# EAGLE board proiect_TSC_2 v66 (EAGLE 9.7.0)
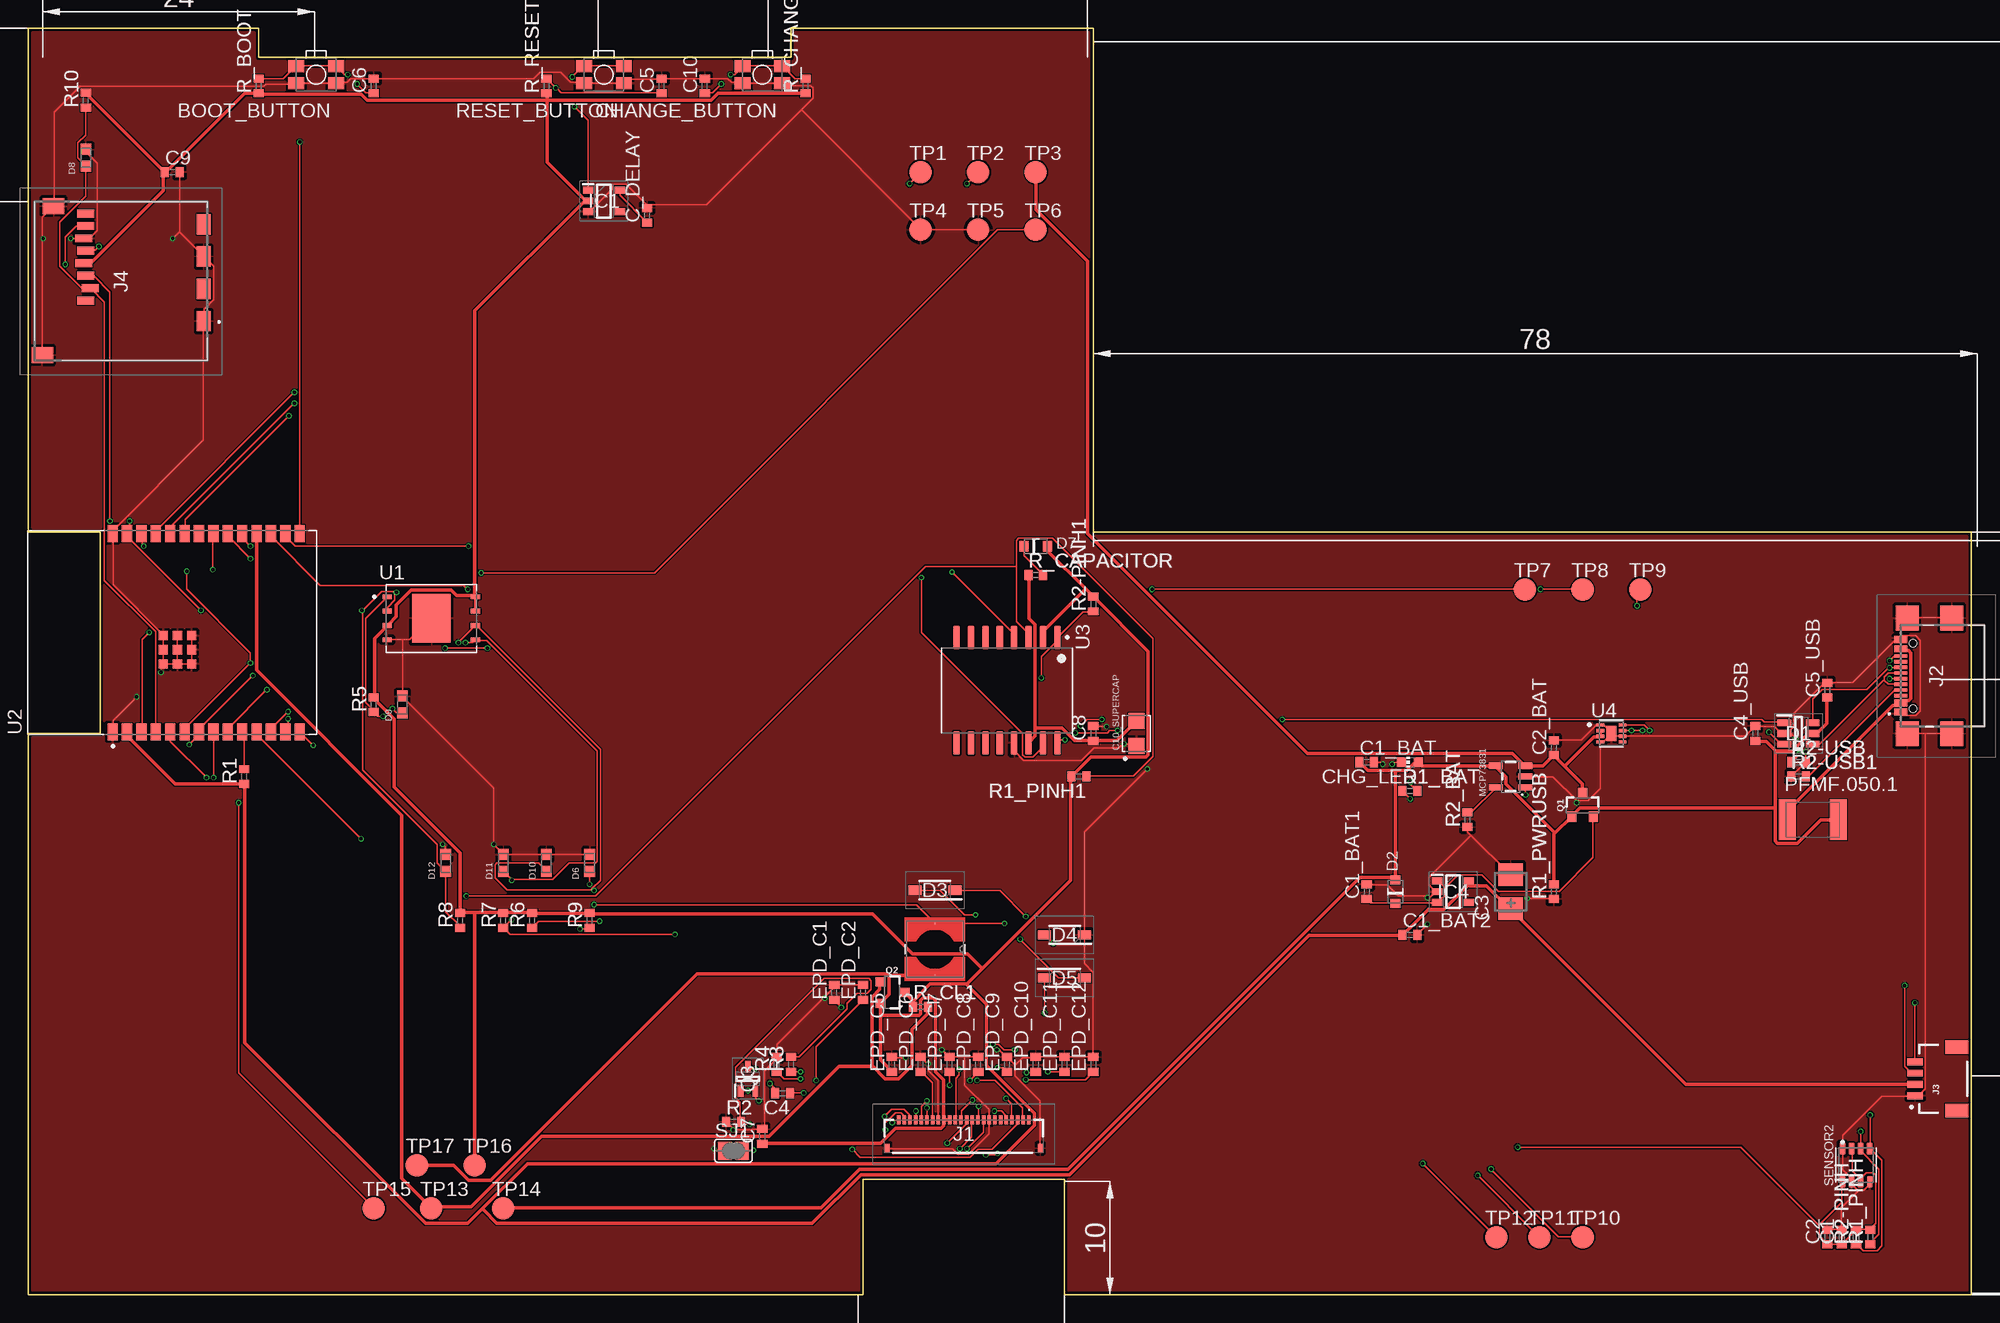
[diagram p0: board, top side]
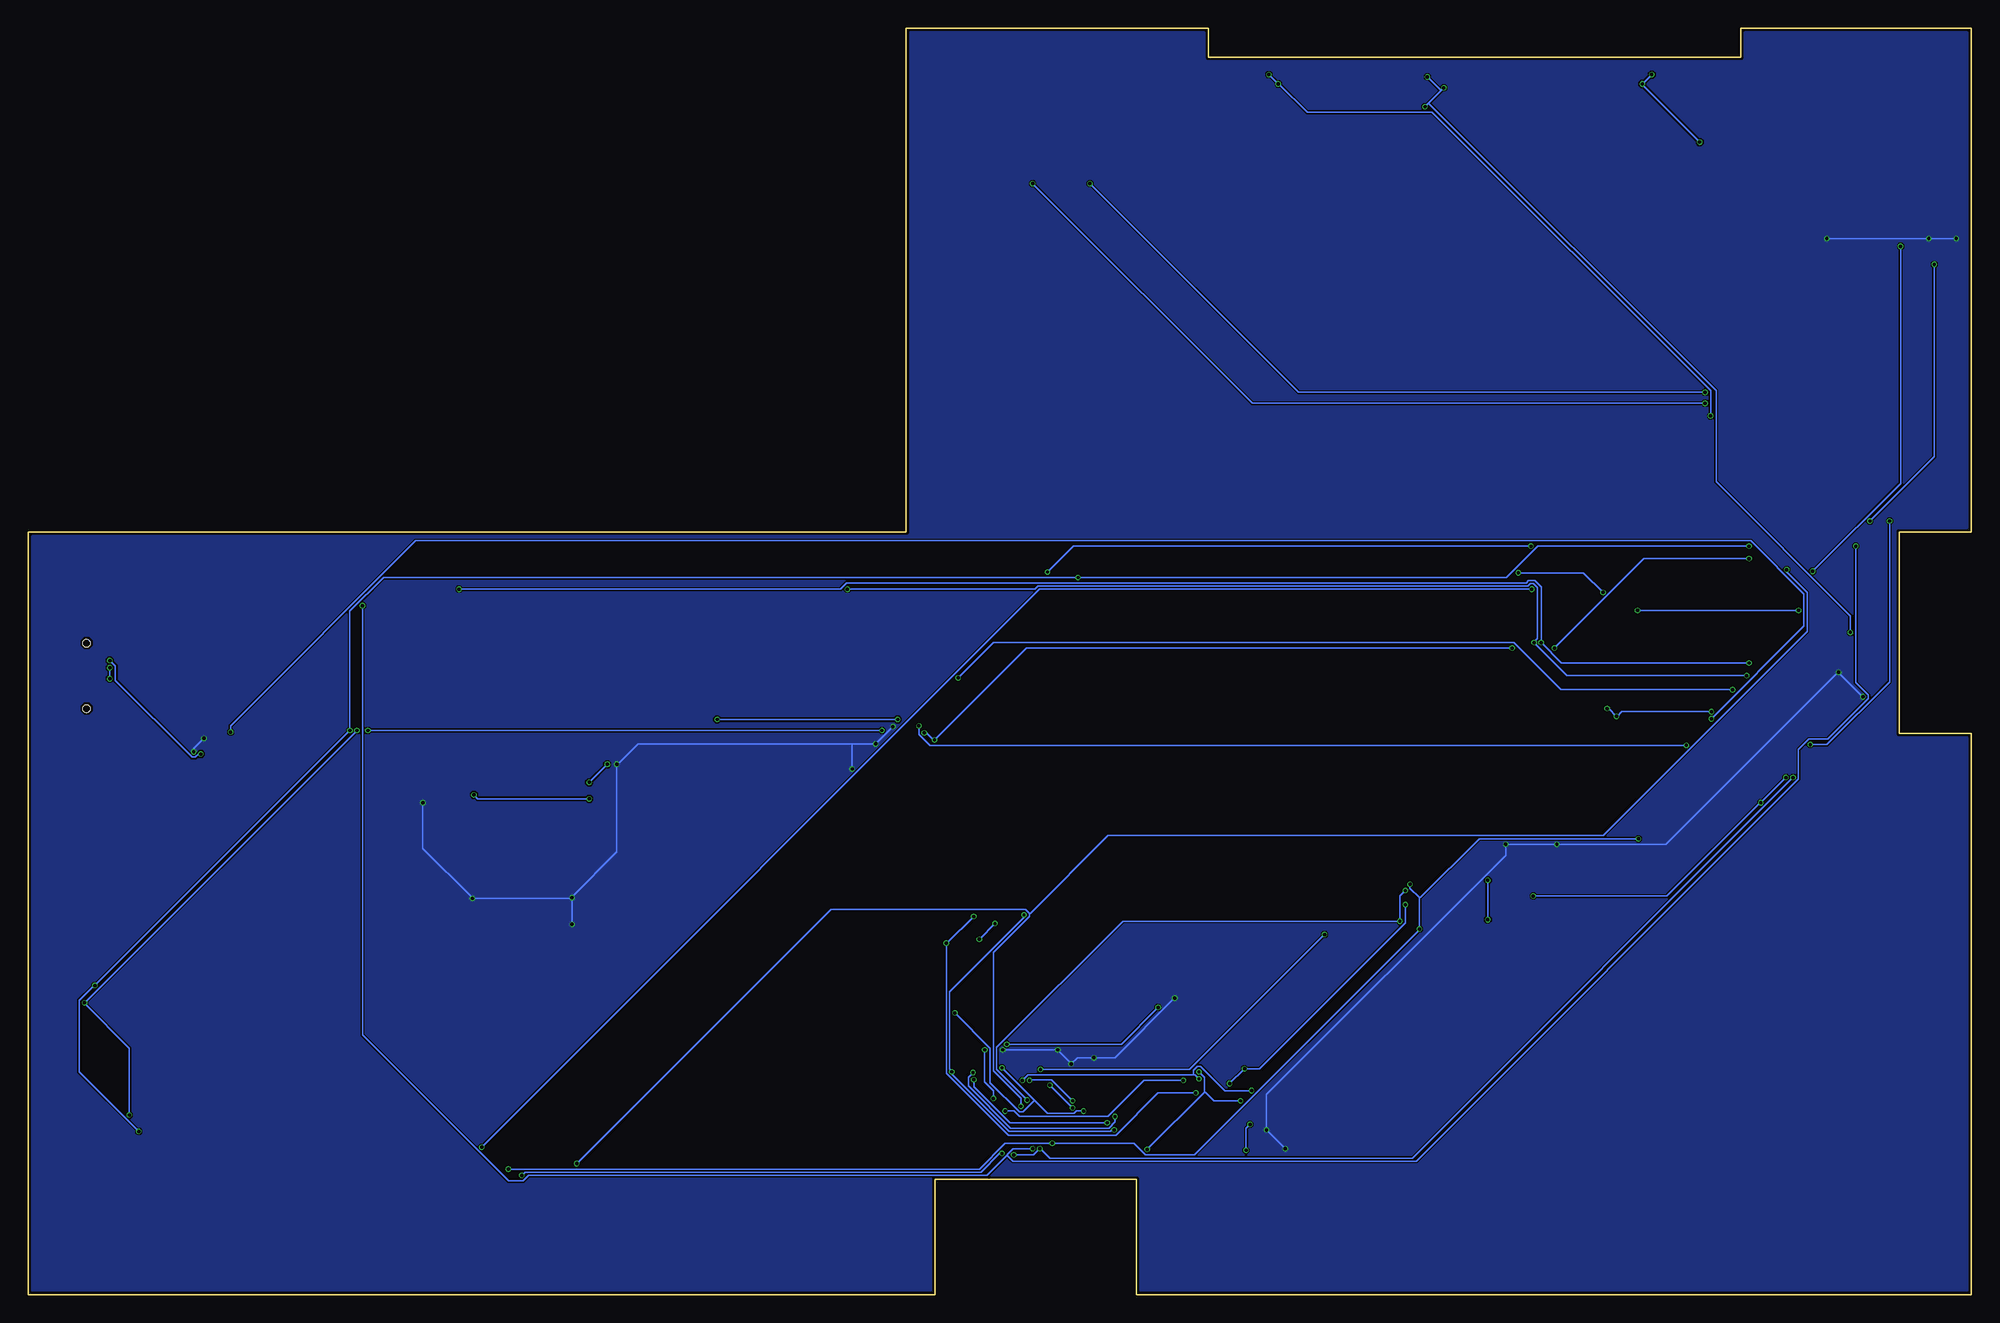
[diagram p1: board, bottom side, seen from below]

Size 171.45 x 111.76 mm. Coordinates in mm from the lower left corner, seen from the top.
Outline: 0,49.53 0,0 73.66,0 73.66,10.16 91.44,10.16 91.44,0 171.45,0 171.45,67.31 93.98,67.31 93.98,111.76 67.31,111.76 67.31,109.22 20.32,109.22 20.32,111.76 0,111.76 0,67.31 6.35,67.31 6.35,49.53 0,49.53
Copper layers (1*16): Top / Bottom
Stack-up Default Layer Stack: Top User Defined 0.035mm / Dielectric-1 User Defined 1.6mm / Bottom User Defined 0.035mm
Design rules: minimum copper width classes=1 0.3mm, minimum copper width classes=2 0.15mm, minimum copper width 0.15mm, minimum drill size 0.3mm, copper clearance wire_polygon to wire_polygon 5mil, copper clearance wire_polygon to pad_smd 5mil, copper clearance wire_polygon to via 5mil, copper clearance pad_smd to pad_smd 5mil, copper clearance pad_smd to via 5mil, copper clearance via to via 5mil, copper clearance smd to pad (same net) 5mil, copper clearance smd to via (same net) 5mil, copper clearance smd to smd (same net) 5mil, dimension clearance 0.2mm, via restrict clearance 0mil, restrict clearance 0mil, drill distance 6mil, keepout clearance 0mil
Net classes: 1 class: width 0.3 mm; 2 normal: width 0.15 mm

## Footprints (pad centres in the part's own frame; a part is rotated, then mirrored left to right if it is on the bottom)
MYBUTTON = smd 1.4 x 1.05: 1 1.75,0.75; 2 -1.75,0.75; 3 -1.75,-0.75; 4 1.75,-0.75
EAGLE-LTSPICE_C0402 = smd 0.7 x 0.9: 1 -0.65,0; 2 0.65,0
RCL_CT3528 = smd 2 x 2.2: + -1.5,0; - 1.5,0
CAPCP3225X100N = smd 1.4 x 1.4: 1 -1.1,0; 2 1.1,0
ADAFRUIT_CHIP-LED0603 = smd 0.8 x 0.8: A 0,-0.75; C 0,0.75
SOT95P280X145-6N = smd 1.2 x 0.6: 1 -1.25,0.95; 2 -1.25,0; 3 -1.25,-0.95; 4 1.25,-0.95; 5 1.25,0; 6 1.25,0.95
ESP32_WROVER_AVX---SD0805S020S1R0_AVX_SD0805S020S1R0_0 = smd 0.8 x 0.9: 1 -1.05,0; 2 1.05,0
SOD3716X135N = smd 1.15 x 0.8: 1 -1.75,0; 2 1.75,0
DIOC1608X36N = smd 0.97 x 0.94: 1 -0.75,0; 2 0.75,0
SOT95P280X125-5N = smd 0.9 x 0.6: 1 -1.4,0.95; 2 -1.4,0; 3 -1.4,-0.95; 4 1.4,-0.95; 5 1.4,0.95
SOT95P280X120-5N = smd 0.9 x 0.6: 1 -1.4,0.95; 2 -1.4,0; 3 -1.4,-0.95; 4 1.4,-0.95; 5 1.4,0.95
FH34SRJ24S05SH99 = smd 0.3 x 0.8: 1 5.75,1.45; 2 5.25,1.45; 3 4.75,1.45; 4 4.25,1.45; 5 3.75,1.45; 6 3.25,1.45; 7 2.75,1.45; 8 2.25,1.45; 9 1.75,1.45; 10 1.25,1.45; 11 0.75,1.45; 12 0.25,1.45; 13 -0.25,1.45; 14 -0.75,1.45; 15 -1.25,1.45; 16 -1.75,1.45; 17 -2.25,1.45; 18 -2.75,1.45; 19 -3.25,1.45; 20 -3.75,1.45; 21 -4.25,1.45; 22 -4.75,1.45; 23 -5.25,1.45; 24 -5.75,1.45 | smd 0.4 x 0.8: MP1 6.75,-1.05; MP2 -6.75,-1.05
SAMACSYS_PARTS_USB4110GFA = smd 0.3 x 1.15: A1 -3.35,3.678; A4 -2.55,3.678; A5 -1.25,3.678; A6 -0.25,3.678; A7 0.25,3.678; A8 1.25,3.678; A9 2.55,3.678; A12 3.35,3.678; B1 3.05,3.678; B4 2.25,3.678; B5 1.75,3.678; B6 0.75,3.678; B7 -0.75,3.678; B8 -1.75,3.678; B9 -2.25,3.678; B12 -3.05,3.678 | smd 2.18 x 2: MP1 -5.11,-0.827; MP2 5.11,-0.827; MP3 -5.11,3.103; MP4 5.11,3.103 | hole 0.65: -2.89,2.603; 2.89,2.603
JST04_1MM_RA = smd 0.6 x 1.35: 1 -1.5,0; 2 -0.5,0; 3 0.5,0; 4 1.5,0 | smd 1.2 x 2: NC1 2.8,-3.675; NC2 -2.8,-3.675
112ATAARR03ATTEND = smd 1.8 x 1.2: G1 10.6,10.4; G2 4.9,10.4; S1 7.75,10.4; S2 2.05,10.4 | smd 1.4 x 1.9: G3 13.6,-3.85; G4 0.45,-2.85 | smd 0.7 x 1.5: P1 8.8,0; P2 7.7,0.4; P3 6.6,0; P4 5.5,-0.2; P5 4.4,0; P6 3.3,-0.2; P7 2.2,0; P8 1.1,0
IND_4828-WE-TPC_WRE = smd 0.127 x 0.127: 1 -2.286,0; 2 2.286,0
ESP32_WROVER_SPARKFUN-IC-POWER_SOT23-5 = smd 0.55 x 1.2: 1 -0.95,-1.3; 2 0,-1.3; 3 0.95,-1.3; 4 0.95,1.3; 5 -0.95,1.3
ESP32C6_VARISTOR_CT/CN1812 = smd 1.5 x 3.6: 1 -2.25,0; 2 2.25,0
ESP32_WROVER_SPARKFUN-DISCRETESEMI_SOT23-3 = smd 0.8 x 0.9: 1 -0.95,-1; 2 0.95,-1; 3 0,1.1
SOT65P210X110-3N = smd 1.05 x 0.5: 1 -1.05,0.65; 2 -1.05,-0.65; 3 1.05,0
ESP32_WROVER_EAGLE-LTSPICE_R0402 = smd 0.7 x 0.9: 1 -0.65,0; 2 0.65,0
ESP32_WROVER_BME680_PSON80P300X300X100-8N = smd 1.016 x 0.5: 1 1.458,1.2; 2 1.458,0.4; 3 1.458,-0.4; 4 1.458,-1.2; 5 -1.458,-1.22; 6 -1.458,-0.4; 7 -1.458,0.4; 8 -1.458,1.2
SJ = smd 1.168 x 1.6: 1 -0.762,0; 2 0.762,0
TP20R = smd 2 x 2: TP 0,0
SON127P600X800X80-9N = smd 0.94 x 0.44: 1 -3.895,1.905; 2 -3.895,0.635; 3 -3.895,-0.635; 4 -3.895,-1.905; 5 3.895,-1.905; 6 3.895,-0.635; 7 3.895,0.635; 8 3.895,1.905 | smd 3.4 x 4.3: 9 0,0
XCVR_ESP32-C6-WROOM-1-N8 = smd 1.5 x 0.9: 1 -8.75,5.26; 2 -8.75,3.99; 3 -8.75,2.72; 4 -8.75,1.45; 5 -8.75,0.18; 6 -8.75,-1.09; 7 -8.75,-2.36; 8 -8.75,-3.63; 9 -8.75,-4.9; 10 -8.75,-6.17; 11 -8.75,-7.44; 12 -8.75,-8.71; 13 -8.75,-9.98; 14 -8.75,-11.25; 15 8.75,-11.25; 16 8.75,-9.98; 17 8.75,-8.71; 18 8.75,-7.44; 19 8.75,-6.17; 20 8.75,-4.9; 21 8.75,-3.63; 22 8.75,-2.36; 23 8.75,-1.09; 24 8.75,0.18; 25 8.75,1.45; 26 8.75,2.72; 27 8.75,3.99; 28 8.75,5.26 | smd 0.8 x 0.8: 29_1 -2.755,0.79; 29_2 -1.505,0.79; 29_3 -0.255,0.79; 29_4 -2.755,-0.46; 29_5 -1.505,-0.46; 29_6 -0.255,-0.46; 29_7 -2.755,-1.71; 29_8 -1.505,-1.71; 29_9 -0.255,-1.71
SOIC127P1032X265-16N = smd 2.05 x 0.59: 1 -4.655,4.445; 2 -4.655,3.175; 3 -4.655,1.905; 4 -4.655,0.635; 5 -4.655,-0.635; 6 -4.655,-1.905; 7 -4.655,-3.175; 8 -4.655,-4.445; 9 4.655,-4.445; 10 4.655,-3.175; 11 4.655,-1.905; 12 4.655,-0.635; 13 4.655,0.635; 14 4.655,1.905; 15 4.655,3.175; 16 4.655,4.445
SON50P200X200X80-9N = smd 0.76 x 0.27: 1 -0.985,0.75; 2 -0.985,0.25; 3 -0.985,-0.25; 4 -0.985,-0.75; 5 0.985,-0.75; 6 0.985,-0.25; 7 0.985,0.25; 8 0.985,0.75 | smd 0.9 x 1.3: 9 0,0

## Placement (x,y rotation side)
BOOT_BUTTON  BUTTON_CUSYOMV1  [MYBUTTON]  25.4,107.67 180 top
C1  100nF  [EAGLE-LTSPICE_C0402]  160.02,5.08 90 top
C1_BAT  4.7uF  [EAGLE-LTSPICE_C0402]  118.11,46.99 0 top
C1_BAT1  4.7uF  [EAGLE-LTSPICE_C0402]  118.11,35.56 90 top
C1_BAT2  4.7uF  [EAGLE-LTSPICE_C0402]  121.92,31.75 0 top
C2  100nF  [EAGLE-LTSPICE_C0402]  158.75,5.08 90 top
C2_BAT  4.7uF  [EAGLE-LTSPICE_C0402]  134.62,48.26 90 top
C3  100uF  [RCL_CT3528]  130.81,35.56 90 top
C4  4.7uF/25V  [EAGLE-LTSPICE_C0402]  66.55,17.78 180 top
C4_USB  100nF  [EAGLE-LTSPICE_C0402]  152.4,49.53 90 top
C5  1uF  [EAGLE-LTSPICE_C0402]  55.88,106.68 90 top
C5_USB  4.7uF  [EAGLE-LTSPICE_C0402]  158.75,53.34 90 top
C6  100nF  [EAGLE-LTSPICE_C0402]  30.48,106.68 90 top
C7  10uF  [EAGLE-LTSPICE_C0402]  64.77,13.97 90 top
C8  100nF  [EAGLE-LTSPICE_C0402]  93.98,49.53 90 top
C9  100nF  [EAGLE-LTSPICE_C0402]  12.7,99.06 0 top
C10  100nF  [EAGLE-LTSPICE_C0402]  59.69,106.68 90 top
C10_SUPERCAP  CPH3225A  [CAPCP3225X100N]  97.79,49.53 90 top
C_DELAY  100nF  [EAGLE-LTSPICE_C0402]  54.61,95.25 90 top
CHANGE_BUTTON  BUTTON_CUSYOMV1  [MYBUTTON]  64.77,107.67 180 top
CHG_LED  [ADAFRUIT_CHIP-LED0603]  121.92,46.99 90 top
D1  USBLC6-2SC6Y  [SOT95P280X145-6N]  156.21,49.53 0 top
D2  ESP32_WROVER_AVX---SD0805S020S1R0_AVX_SD0805S020S1R0_0_0AVX_SD0805S020S1R0_0_0  [ESP32_WROVER_AVX---SD0805S020S1R0_AVX_SD0805S020S1R0_0]  120.65,35.56 90 top
D3  MBR0530  [SOD3716X135N]  80.01,35.7 180 top
D4  MBR0530  [SOD3716X135N]  91.44,31.75 180 top
D5  MBR0530  [SOD3716X135N]  91.44,27.94 0 top
D6  PGB1010603MR  [DIOC1608X36N]  49.53,38.1 90 top
D7  ESP32_WROVER_AVX---SD0805S020S1R0_AVX_SD0805S020S1R0_0_0AVX_SD0805S020S1R0_0_0  [ESP32_WROVER_AVX---SD0805S020S1R0_AVX_SD0805S020S1R0_0]  88.9,66.04 0 top
D8  PGB1010603MR  [DIOC1608X36N]  5.08,100.33 90 top
D9  PGB1010603MR  [DIOC1608X36N]  33.02,52.07 90 top
D10  PGB1010603MR  [DIOC1608X36N]  45.72,38.1 90 top
D11  PGB1010603MR  [DIOC1608X36N]  41.91,38.1 90 top
D12  PGB1010603MR  [DIOC1608X36N]  36.83,38.1 90 top
EPD_C1  1uF/50V  [EAGLE-LTSPICE_C0402]  71.12,26.67 90 top
EPD_C2  1uF/50V  [EAGLE-LTSPICE_C0402]  73.66,26.67 90 top
EPD_C5  1uF/50V  [EAGLE-LTSPICE_C0402]  76.2,20.32 90 top
EPD_C6  1uF/50V  [EAGLE-LTSPICE_C0402]  78.74,20.32 90 top
EPD_C7  1uF/50V  [EAGLE-LTSPICE_C0402]  81.28,20.32 90 top
EPD_C8  1uF/50V  [EAGLE-LTSPICE_C0402]  83.82,20.32 90 top
EPD_C9  1uF/50V  [EAGLE-LTSPICE_C0402]  86.36,20.32 90 top
EPD_C10  1uF/50V  [EAGLE-LTSPICE_C0402]  88.9,20.32 90 top
EPD_C11  1uF/50V  [EAGLE-LTSPICE_C0402]  91.44,20.32 90 top
EPD_C12  1uF/50V  [EAGLE-LTSPICE_C0402]  93.98,20.32 90 top
IC1  BD5229G-TR  [SOT95P280X125-5N]  50.8,96.52 0 top
IC4  XC6220A331MR-G  [SOT95P280X120-5N]  125.73,35.56 0 top
J1  FH34SRJ-24S-0.5SH_99_  [FH34SRJ24S05SH99]  82.55,13.97 0 top
J2  SAMACSYS_PARTS_USB4110-GF-A  [SAMACSYS_PARTS_USB4110GFA]  168.91,54.61 90 top
J3  QWIIC_RIGHT_ANGLE  [JST04_1MM_RA]  166.5,19.05 90 top
J4  112A-TAAR-R03_ATTEND  [112ATAARR03ATTEND]  5.08,96.52 270 top
L1  68uH  [IND_4828-WE-TPC_WRE]  80.01,30.48 270 top
MCP73831  ESP32_WROVER_SPARKFUN-IC-POWER_MCP73831  [ESP32_WROVER_SPARKFUN-IC-POWER_SOT23-5]  130.81,45.72 90 top
PFMF.050.1  ESP32C6_VARISTORCN1812  [ESP32C6_VARISTOR_CT/CN1812]  157.48,41.91 0 top
Q1  20V/4.2A/52mΩ/1.4W  [ESP32_WROVER_SPARKFUN-DISCRETESEMI_SOT23-3]  137.16,43.18 0 top
Q2  20V/4.2A/52mΩ/1.4W  [ESP32_WROVER_SPARKFUN-DISCRETESEMI_SOT23-3]  76.2,26.67 270 top
Q3  SI1308EDL-T1-GE3  [SOT65P210X110-3N]  63.5,19.05 90 top
R1  10K  [ESP32_WROVER_EAGLE-LTSPICE_R0402]  19.05,45.72 90 top
R1_BAT  200  [ESP32_WROVER_EAGLE-LTSPICE_R0402]  121.92,44.45 0 top
R1_PINH  10K  [ESP32_WROVER_EAGLE-LTSPICE_R0402]  162.56,5.08 90 top
R1_PINH1  10K  [ESP32_WROVER_EAGLE-LTSPICE_R0402]  92.71,45.72 180 top
R1_PWRUSB  100k  [ESP32_WROVER_EAGLE-LTSPICE_R0402]  134.62,35.56 90 top
R2  2.2  [ESP32_WROVER_EAGLE-LTSPICE_R0402]  62.23,15.24 0 top
R2-PINH  10K  [ESP32_WROVER_EAGLE-LTSPICE_R0402]  161.29,5.08 90 top
R2-PINH1  10K  [ESP32_WROVER_EAGLE-LTSPICE_R0402]  93.98,60.96 90 top
R2-USB  5k1  [ESP32_WROVER_EAGLE-LTSPICE_R0402]  156.21,46.99 0 top
R2-USB1  5k1  [ESP32_WROVER_EAGLE-LTSPICE_R0402]  156.21,45.72 0 top
R2_BAT  2K  [ESP32_WROVER_EAGLE-LTSPICE_R0402]  127,41.91 90 top
R3  0.47  [ESP32_WROVER_EAGLE-LTSPICE_R0402]  67.31,20.32 90 top
R4  10k  [ESP32_WROVER_EAGLE-LTSPICE_R0402]  66.04,20.32 90 top
R5  10K  [ESP32_WROVER_EAGLE-LTSPICE_R0402]  30.48,52.07 90 top
R6  10K  [ESP32_WROVER_EAGLE-LTSPICE_R0402]  44.45,33.02 90 top
R7  10K  [ESP32_WROVER_EAGLE-LTSPICE_R0402]  41.91,33.02 90 top
R8  10K  [ESP32_WROVER_EAGLE-LTSPICE_R0402]  38.1,33.02 90 top
R9  10K  [ESP32_WROVER_EAGLE-LTSPICE_R0402]  49.53,33.02 90 top
R10  10K  [ESP32_WROVER_EAGLE-LTSPICE_R0402]  5.08,105.41 90 top
R_BOOT  10K  [ESP32_WROVER_EAGLE-LTSPICE_R0402]  20.32,106.68 90 top
R_CAPACITOR  15  [ESP32_WROVER_EAGLE-LTSPICE_R0402]  88.9,63.5 0 top
R_CHANGE  10K  [ESP32_WROVER_EAGLE-LTSPICE_R0402]  68.58,106.68 90 top
R_CL1  10K  [ESP32_WROVER_EAGLE-LTSPICE_R0402]  78.74,25.4 0 top
R_RESET  10K  [ESP32_WROVER_EAGLE-LTSPICE_R0402]  45.72,106.68 90 top
RESET_BUTTON  BUTTON_CUSYOMV1  [MYBUTTON]  50.8,107.67 180 top
SENSOR2  ESP32_WROVER_BME680_BME680  [ESP32_WROVER_BME680_PSON80P300X300X100-8N]  161.29,11.43 90 top
SJ1  [SJ]  62.23,12.7 0 top
TP1  TPTP20R  [TP20R]  78.74,99.06 0 top
TP2  TPTP20R  [TP20R]  83.82,99.06 0 top
TP3  TPTP20R  [TP20R]  88.9,99.06 0 top
TP4  TPTP20R  [TP20R]  78.74,93.98 0 top
TP5  TPTP20R  [TP20R]  83.82,93.98 0 top
TP6  TPTP20R  [TP20R]  88.9,93.98 0 top
TP7  TPTP20R  [TP20R]  132.08,62.23 0 top
TP8  TPTP20R  [TP20R]  137.16,62.23 0 top
TP9  TPTP20R  [TP20R]  142.24,62.23 0 top
TP10  TPTP20R  [TP20R]  137.16,5.08 0 top
TP11  TPTP20R  [TP20R]  133.35,5.08 0 top
TP12  TPTP20R  [TP20R]  129.54,5.08 0 top
TP13  TPTP20R  [TP20R]  35.56,7.62 0 top
TP14  TPTP20R  [TP20R]  41.91,7.62 0 top
TP15  TPTP20R  [TP20R]  30.48,7.62 0 top
TP16  TPTP20R  [TP20R]  39.37,11.43 0 top
TP17  TPTP20R  [TP20R]  34.29,11.43 0 top
U1  W25Q512JVEIQ  [SON127P600X800X80-9N]  35.56,59.69 0 top
U2  ESP32-C6-WROOM-1-N8  [XCVR_ESP32-C6-WROOM-1-N8]  12.7,58.42 90 top
U3  DS3231SN#  [SOIC127P1032X265-16N]  86.36,53.34 270 top
U4  MAX17048G+T10  [SON50P200X200X80-9N]  139.7,49.53 0 top

## Library data of the parts
BOOT_BUTTON CHANGE_BUTTON CHG_LED PFMF.050.1 RESET_BUTTON SJ1 TP1-TP17 = lib_proiect
C1 C1_BAT C1_BAT1 C1_BAT2 C2 C2_BAT C4 C4_USB C5 C5_USB C6-C10 C_DELAY EPD_C1 EPD_C2 EPD_C5-EPD_C12 = lib_proiect; SPICEMODEL: NONE; SPICEPREFIX: C
C3 = lib_proiect; SPICEPREFIX: C
C10_SUPERCAP = lib_proiect; AVAILABILITY: Not in stock; CHECK_PRICES: https://www.snapeda.com/parts/CPH3225A/Seiko+Instruments/view-part/?ref=eda; DESCRIPTION: 11 mF (EDLC) Supercapacitor 3.3 V 1210 (3225 Metric) - -; MF: Seiko Instruments; MP: CPH3225A; PACKAGE: 1210 Seiko; PRICE: None; PURCHASE-URL: https://www.snapeda.com/api/url_track_click_mouser/?unipart_id=562593&manufacturer=Seiko Instruments&part_name=CPH3225A&search_term=None; SNAPEDA_LINK: https://www.snapeda.com/parts/CPH3225A/Seiko+Instruments/view-part/?ref=snap
D1 = lib_proiect; AVAILABILITY: In Stock; CHECK_PRICES: https://www.snapeda.com/parts/USBLC6-2SC6Y/STMicroelectronics/view-part/?ref=eda; DESCRIPTION: 17V Clamp 5A (8/20µs) Ipp Tvs Diode Surface Mount SOT-23-6; MF: STMicroelectronics; MP: USBLC6-2SC6Y; PACKAGE: SOT-23-6 STMicroelectronics; PRICE: None; SNAPEDA_LINK: https://www.snapeda.com/parts/USBLC6-2SC6Y/STMicroelectronics/view-part/?ref=snap
D2 D7 = lib_proiect; CENTROID_NOT_SPECIFIED: No; DATASHEET: http://datasheets.avx.com/schottky.pdf; DIGIKEY_DESCRIPTION: DIODE SCHOTTKY 20V 1A 0805; DIGIKEY_PART_NUMBER: 478-7800-1-ND; LEAD_FREE: yes; MF: AVX; MOUSER_PART_NUMBER: 581-SD0805S020S1R0; PACKAGE: 0805 (2012 metric); PREFIX: D; ROHS: yes; TEMPERATURE_RANGE_HIGH: +125°C; TEMPERATURE_RANGE_LOW: -55°C
D3-D5 = lib_proiect; AVAILABILITY: In Stock; CHECK_PRICES: https://www.snapeda.com/parts/MBR0530/Onsemi/view-part/?ref=eda; DESCRIPTION: Diode Schottky 30 V 500mA Surface Mount SOD-123; MF: ON Semiconductor; MP: MBR0530; PACKAGE: SOD-123-2 ON Semiconductor; PRICE: None; PURCHASE-URL: https://www.snapeda.com/api/url_track_click_mouser/?unipart_id=179458&manufacturer=ON Semiconductor&part_name=MBR0530&search_term=None; SNAPEDA_LINK: https://www.snapeda.com/parts/MBR0530/Onsemi/view-part/?ref=snap
D6 D8-D12 = lib_proiect; AVAILABILITY: In Stock; CHECK_PRICES: https://www.snapeda.com/parts/PGB1010603MR/Littelfuse/view-part/?ref=eda; DESCRIPTION: 150V (Typ) Clamp - Ipp Tvs Diode Surface Mount 0603 (1608 Metric); MF: Littelfuse Inc.; MP: PGB1010603MR; PACKAGE: 0603 Littelfuse Inc.; PRICE: None; PURCHASE-URL: https://www.snapeda.com/api/url_track_click_mouser/?unipart_id=5659453&manufacturer=Littelfuse Inc.&part_name=PGB1010603MR&search_term=None; SNAPEDA_LINK: https://www.snapeda.com/parts/PGB1010603MR/Littelfuse/view-part/?ref=snap
IC1 = lib_proiect; DESCRIPTION: Voltage Detector with Adjustable Delay Time: CMOS processes are utilized to develop high precision, low current consumption CMOS reset ICs that allow arbitrary setting of the delay time. The extensive lineup includes both Nch Open Drain and CMOS output types in a wide range of detection voltages (from 2.3V to 6.0V, in 0.1V steps), enabling selection of the ideal solution based on customer requirements. In addition, the entire series is of course both lead-free and RoHS-compliant.; HEIGHT: 1.25mm; MANUFACTURER_NAME: ROHM Semiconductor; MANUFACTURER_PART_NUMBER: BD5229G-TR; MOUSER_PART_NUMBER: 755-BD5229G-TR; MOUSER_PRICE-STOCK: https://www.mouser.co.uk/ProductDetail/ROHM-Semiconductor/BD5229G-TR?qs=4kLU8WoGk0vvnhrrYwdszw%3D%3D
IC4 = lib_proiect; DESCRIPTION: LDO Voltage Regulators; HEIGHT: 1.2mm; MANUFACTURER_NAME: Torex; MANUFACTURER_PART_NUMBER: XC6220A331MR-G; MOUSER_PART_NUMBER: 865-XC6220A331MR-G; MOUSER_PRICE-STOCK: https://www.mouser.co.uk/ProductDetail/Torex-Semiconductor/XC6220A331MR-G?qs=AsjdqWjXhJ8ZSWznL1J0gg%3D%3D
J1 = lib_proiect; DESCRIPTION: 24 Position FFC, FPC Connector Contacts, Top and Bottom 0.020" (0.50mm) Surface Mount, Right Angle; HEIGHT: 1.1mm; MANUFACTURER_NAME: Hirose; MANUFACTURER_PART_NUMBER: FH34SRJ-24S-0.5SH(99); MOUSER_PART_NUMBER: 798-FH34SRJ24S05SH99; MOUSER_PRICE-STOCK: https://www.mouser.co.uk/ProductDetail/Hirose-Connector/FH34SRJ-24S-0.5SH99?qs=vcbW%252B4%252BSTIpKBl5ap9J8Fw%3D%3D
J2 = lib_proiect; DESCRIPTION: CONN USB 2.0 TYPE-C R/A SMT; HEIGHT: 3.26mm; MANUFACTURER_NAME: GCT (GLOBAL CONNECTOR TECHNOLOGY); MANUFACTURER_PART_NUMBER: USB4110-GF-A; MOUSER_PART_NUMBER: 640-USB4110-GF-A; MOUSER_PRICE-STOCK: https://www.mouser.co.uk/ProductDetail/GCT/USB4110-GF-A?qs=KUoIvG%2F9IlYiZvIXQjyJeA%3D%3D
J3 = lib_proiect; PROD_ID: CONN-13694
J4 = lib_proiect; DESCRIPTION: Micro SD Card Socket, Push-Push Type, Top Mount, SMT, H=1.83mm, 10u; HEIGHT: 1.9mm; MANUFACTURER_NAME: ATTEND; MANUFACTURER_PART_NUMBER: 112A-TAAR-R03 ATTEND
L1 = lib_proiect; COPYRIGHT: Copyright (C) 2024 Ultra Librarian. All rights reserved.; MANUFACTURER_PART_NUMBER: 744043680; MFR_NAME: Wurth Electronics
MCP73831 = lib_proiect; PROD_ID: IC-09995
Q1 Q2 = lib_proiect; PROD_ID: TRAN-14388
Q3 = lib_proiect; AVAILABILITY: In Stock; CHECK_PRICES: https://www.snapeda.com/parts/SI1308EDL-T1-GE3/Vishay+Siliconix/view-part/?ref=eda; DESCRIPTION: Si1308EDL-T1-GE3 N-channel MOSFET Transistor, 1.5 A, 30 V, 3-Pin SC-70 | Siliconix / Vishay SI1308EDL-T1-GE3; MF: Vishay Siliconix; MP: SI1308EDL-T1-GE3; PACKAGE: SOT-323 Vishay Semiconductor; PRICE: None; PURCHASE-URL: https://www.snapeda.com/api/url_track_click_mouser/?unipart_id=274603&manufacturer=Vishay Siliconix&part_name=SI1308EDL-T1-GE3&search_term=None; SNAPEDA_LINK: https://www.snapeda.com/parts/SI1308EDL-T1-GE3/Vishay+Siliconix/view-part/?ref=snap
R1 R1_BAT R1_PINH R1_PINH1 R1_PWRUSB R2 R2-PINH R2-PINH1 R2-USB R2-USB1 R2_BAT R3-R10 R_BOOT R_CAPACITOR R_CHANGE R_CL1 R_RESET = lib_proiect; SPICEMODEL: NONE; SPICEPREFIX: R
SENSOR2 = lib_proiect; AVAILABILITY: Unavailable; DESCRIPTION: Integrated Environmental Unit; MF: Bosch Sensortec; MP: BME680; PACKAGE: LGA-8 Bosch Tools; PRICE: None
U1 = lib_proiect; AVAILABILITY: In Stock; CHECK_PRICES: https://www.snapeda.com/parts/W25Q512JVEIQ/Winbond+Electronics/view-part/?ref=eda; DESCRIPTION: FLASH - NOR Memory IC 512Mb (64M x 8) SPI - Quad I/O 133 MHz 8-WSON (8x6); MF: Winbond Electronics; MP: W25Q512JVEIQ; PACKAGE: Package; PRICE: None; SNAPEDA_LINK: https://www.snapeda.com/parts/W25Q512JVEIQ/Winbond+Electronics/view-part/?ref=snap
U2 = lib_proiect; AVAILABILITY: In Stock; CHECK_PRICES: https://www.snapeda.com/parts/ESP32-C6-WROOM-1-N8/Espressif+Systems/view-part/?ref=eda; DESCRIPTION: Multiprotocol Modules ESP32-C6 module, Wi-Fi 6 in 2.4 GHz band, Bluetooth 5, Zigbee 3.0 and Thread. ESP34-WROOM Compatible - ENGINEERING SAMPLE; MF: Espressif Systems; MP: ESP32-C6-WROOM-1-N8; PACKAGE: None; PRICE: None; SNAPEDA_LINK: https://www.snapeda.com/parts/ESP32-C6-WROOM-1-N8/Espressif+Systems/view-part/?ref=snap
U3 = lib_proiect; AVAILABILITY: In Stock; CHECK_PRICES: https://www.snapeda.com/parts/DS3231SN%23/Analog+Devices/view-part/?ref=eda; DESCRIPTION: Extremely Accurate I²C-Integrated RTC/TCXO/Crystal; MF: Analog Devices; MP: DS3231SN#; PACKAGE: SOIC-16 Maxim; PRICE: None; PURCHASE-URL: https://www.snapeda.com/api/url_track_click_mouser/?unipart_id=99048&manufacturer=Analog Devices&part_name=DS3231SN#&search_term=None; SNAPEDA_LINK: https://www.snapeda.com/parts/DS3231SN%23/Analog+Devices/view-part/?ref=snap
U4 = lib_proiect; AVAILABILITY: In Stock; CHECK_PRICES: https://www.snapeda.com/parts/MAX17048G+T10/Analog+Devices/view-part/?ref=eda; DESCRIPTION: 3µA 1-Cell/2-Cell Fuel Gauge with ModelGauge; MF: Analog Devices; MP: MAX17048G+T10; PACKAGE: TDFN-8 Maxim; PRICE: None; PURCHASE-URL: https://www.snapeda.com/api/url_track_click_mouser/?unipart_id=329239&manufacturer=Analog Devices&part_name=MAX17048G+T10&search_term=None; SNAPEDA_LINK: https://www.snapeda.com/parts/MAX17048G+T10/Analog+Devices/view-part/?ref=snap

## Nets
3V3 [class]: C1_BAT2.1 C3.+ C9.1 D7.2 IC1.2 IC4.5 J3.2 J4.P4 Q2.3 R1.1 R1_PINH1.2 R2-PINH1.2 R5.2 R6.2 R7.2 R8.2 R9.2 R10.2 R_BOOT.1 R_CHANGE.1 R_CL1.1 R_RESET.1 TP16.TP U1.3 U1.7 U1.8 U2.2 U3.2
32KHZ [normal]: R2-PINH1.1 U2.9 U3.1
DN [normal]: D1.4 J2.A7 J2.B7
DP [normal]: D1.6 J2.A6 J2.B6
EPD_3V3 [class]: C7.1 EPD_C5.1 J1.15 J1.16 L1.2 Q2.2 TP17.TP
EPD_3V3_C [class]: Q2.1 R_CL1.2 TP13.TP U2.18
EPD_BUSY [normal]: J1.9 TP9.TP U2.26
EPD_CS [normal]: D6.1 J1.12 R9.1 TP10.TP U2.11
EPD_DC [normal]: J1.11 TP11.TP U2.5
EPD_RST [normal]: J1.10 TP12.TP U2.21
FLASH_CS [normal]: D9.1 R5.1 U1.1 U2.12
GDR [normal]: J1.2 Q3.1 R4.1
GND [normal]: BOOT_BUTTON.1 BOOT_BUTTON.2 C1.2 C1_BAT1.2 C1_BAT2.2 C1_BAT.2 C2.2 C2_BAT.2 C3.- C4_USB.2 C5.2 C5_USB.2 C6.2 C7.2 C8.2 C9.2 C10.2 C10_SUPERCAP.1 C_DELAY.2 CHANGE_BUTTON.1 CHANGE_BUTTON.2 D1.2 D4.1 D6.2 D8.2 D9.2 D10.2 D11.2 D12.2 EPD_C1.2 EPD_C2.2 EPD_C5.2 EPD_C6.2 EPD_C7.2 EPD_C8.2 EPD_C9.2 EPD_C10.2 EPD_C11.2 EPD_C12.2 IC1.3 IC4.2 J1.8 J1.17 J1.MP1 J1.MP2 J2.A1 J2.A12 J2.B1 J2.B12 J2.MP1 J2.MP2 J2.MP3 J2.MP4 J3.1 J4.G1 J4.G2 J4.G3 J4.G4 J4.P6 MCP73831.2 R1_PWRUSB.1 R2-USB1.1 R2-USB.2 R2.1 R2_BAT.1 R4.2 RESET_BUTTON.1 RESET_BUTTON.2 SENSOR2.1 SENSOR2.5 SENSOR2.7 SJ1.1 TP4.TP TP5.TP U1.4 U1.9 U2.1 U2.28 U2.29_1 U2.29_2 U2.29_3 U2.29_4 U2.29_5 U2.29_6 U2.29_7 U2.29_8 U2.29_9 U3.13 U4.1 U4.4 U4.6 U4.9
GPIO8 [normal]: R1.2 U2.10
I2C_PW [normal]: C1.1 C2.1 R1_PINH.2 R2-PINH.2 SENSOR2.2 SENSOR2.6 SENSOR2.8 U2.17
INT_RTC [normal]: R1_PINH1.1 TP15.TP U2.8 U3.3
IO/BOOT [normal]: BOOT_BUTTON.3 BOOT_BUTTON.4 C6.1 R_BOOT.2 U2.15
IO/CHANGE [normal]: C10.1 CHANGE_BUTTON.3 CHANGE_BUTTON.4 R_CHANGE.2 U2.23
MISO [normal]: D12.1 J4.P7 R8.1 TP6.TP U1.2 U2.27
MOSI [normal]: D11.1 J1.14 J4.P3 R7.1 TP7.TP U1.5 U2.7
N$1 [normal]: J2.A5 R2-USB1.2
N$2 [normal]: J2.B5 R2-USB.1
N$3 [normal]: C1_BAT1.1 D2.1 IC4.1 IC4.3 Q1.2
N$4 [normal]: C4.1 D3.1 D4.2
N$5 [normal]: MCP73831.1 R1_BAT.1
N$6 [normal]: CHG_LED.C R1_BAT.2
N$7 [normal]: MCP73831.5 R2_BAT.2
N$8 [normal]: EPD_C12.1 J1.24
N$9 [normal]: C_DELAY.1 IC1.5
N$10 [normal]: EPD_C10.1 J1.22
N$11 [normal]: D7.1 R_CAPACITOR.2
N$12 [normal]: EPD_C8.1 J1.20
N$13 [normal]: EPD_C7.1 J1.19
N$14 [normal]: EPD_C6.1 J1.18
N$15 [normal]: EPD_C2.1 J1.5
N$16 [normal]: EPD_C1.1 J1.4
PREVGH [normal]: D5.1 EPD_C9.1 J1.21
PREVGL [normal]: D3.2 EPD_C11.1 J1.23
RESE [normal]: J1.3 Q3.2 R3.1
RESE' [normal]: R2.2 R3.2 SJ1.2
RESET [normal]: C5.1 IC1.1 R_RESET.2 RESET_BUTTON.3 RESET_BUTTON.4 U2.3
RTC_RST [normal]: U2.16 U3.4
RX [normal]: TP2.TP U2.24
SCK [normal]: D10.1 J1.13 J4.P5 R6.1 TP8.TP U1.6 U2.6
SCL [normal]: J3.4 R2-PINH.1 SENSOR2.4 U2.20 U3.16 U4.7
SDA [normal]: J3.3 R1_PINH.1 SENSOR2.3 U2.19 U3.15 U4.8
SRC [normal]: C4.2 D5.2 L1.1 Q3.3
SS_SD [normal]: D8.1 J4.P2 R10.1 U2.4
TX [normal]: TP1.TP U2.25
USB_D+ [normal]: D1.1 U2.14
USB_D- [normal]: D1.3 U2.13
VBAT [class]: C2_BAT.1 MCP73831.3 Q1.3 TP3.TP U4.2 U4.3
VBUS [class]: C1_BAT.1 C4_USB.1 C5_USB.1 CHG_LED.A D1.5 D2.2 MCP73831.4 PFMF.050.1.2 Q1.1 R1_PWRUSB.2 TP14.TP
VRTC: C8.1 C10_SUPERCAP.2 R_CAPACITOR.1 U3.14
VUSB [class]: J2.A4 J2.A9 J2.B4 J2.B9 PFMF.050.1.1

## Tracks (layer width: path | path; a pad name or v marks a point on that pad's centre or on a via)
3V3
  Top 0.3: C9.1 11.98,99.09 5.06,106.02 R10.2 | C9.1 12.19,99.09 19.11,106.02 20.29,106.02 R_BOOT.1 20.43,105.95 29.36,105.95 29.92,105.4 45.64,105.4 45.78,105.4 | J4.P4 4.92,91.06 5.54,91.06 11.91,97.43 11.91,98.96 C9.1 | 45.78,105.4 45.78,99.92 49.17,96.53 49.38,96.53 IC1.2 49.03,96.46 39.4,86.84 39.4,61.84 39.34,61.7 | 45.78,105.4 45.78,106.02 R_RESET.1 | R_CHANGE.1 68.56,106.02 60.87,106.02 60.25,105.4 45.91,105.4 45.78,105.4 | U1.7 39.47,60.38 39.47,61.56 U1.8 39.34,61.7 | 39.34,61.7 37.81,61.7 37.33,62.18 33.8,62.18 32.48,60.87 32.48,59.83 31.79,59.14 U1.3 31.65,59 30.54,57.89 30.54,52.76 R5.2 30.61,52.63 30.61,52.49 32.27,50.83 32.27,44.8 38.09,38.98 38.09,33.86 R8.2 38.16,33.72 39.4,33.72 | 39.4,33.72 41.9,33.72 R7.2 42.04,33.72 44.39,33.72 R6.2 44.6,33.65 49.52,33.65 R9.2 49.65,33.58 74.51,33.58 78.05,30.05 82.89,30.05 84.07,28.87 84.17,28.77 | TP16.TP 39.4,11.49 39.4,33.58 39.4,33.72 | 127.08,36.15 124.93,34 123.54,34 121.33,31.78 C1_BAT2.1 121.12,31.71 113.02,31.71 91.9,10.59 73.48,10.59 69.18,6.3 41.34,6.3 40.17,7.48 40.06,7.58 | 127.08,36.15 127.08,36.49 IC4.5 | J3.2 166.48,18.55 146.26,18.55 130.81,34 C3.+ 130.68,34.07 128.67,36.08 127.21,36.08 127.08,36.15 | U2.2 8.73,49.65 8.73,49.3 12.95,45.08 R1.1 19.11,44.94 19.11,22.23 35.04,6.3 38.78,6.3 40.06,7.58 | 78.05,25.97 78.05,25.41 R_CL1.1 | 78.05,25.97 77.35,26.66 Q2.3 | 93.32,62.29 93.9,61.7 R2-PINH1.2 94.04,61.56 98.82,56.78 98.82,47.64 98.61,47.43 93.77,47.43 92.1,45.77 R1_PINH1.2 91.97,45.63 91.97,36.56 84.17,28.77 | 93.32,62.29 89.96,65.65 89.96,65.99 D7.2 | 82.82,27.42 79.57,27.42 78.18,26.03 78.05,25.97
  Top 0.3: 84.17,28.77 82.82,27.42 | U3.2 89.54,58.03 89.54,58.51 93.21,62.18 93.32,62.29 | 40.06,7.58 44.04,11.56 85.39,11.56 88.78,14.95 88.78,15.99 84.56,20.22 84.56,25.62 82.89,27.28 82.82,27.42
32KHZ  (via drill 0.3)
  Top 0.15: R2-PINH1.1 93.97,60.24 93.07,60.24 90.86,58.03 U3.1 90.79,57.96 90.79,57.68 89.4,56.3 v89.4,54.43 | v21.05,53.39 17.66,49.99 17.66,49.72 U2.9
  Bottom 0.15: v21.05,53.39 36.22,53.39 40.37,57.54 86.29,57.54 v89.4,54.43
DN
  Top 0.15: 163.78,54.22 164.12,53.87 165.23,53.87 J2.B7 | 163.78,54.22 163.78,54.5 164.12,54.84 165.23,54.84 J2.A7 | D1.4 157.48,48.61 158.1,48.61 163.71,54.22 163.78,54.22
DP  (via drill 0.3)
  Top 0.15: v164.26,54.36 J2.A6 | J2.B6 165.23,55.33 v164.26,55.33 164.19,55.33 162.25,53.39 158.31,53.39 157.48,52.56 157.48,50.55 D1.6
  Bottom 0.15: v164.26,55.33 v164.26,54.36
EPD_3V3
  Top 0.3: J1.16 80.82,15.44 81.23,15.44 J1.15 | C7.1 64.82,13.36 75.21,13.36 76.52,14.68 80.54,14.68 80.75,14.89 80.75,15.3 J1.16 | 75.21,24.65 75.21,25.69 Q2.2 75.28,25.83 75.97,26.52 75.97,28.11 | 75.21,24.65 75.21,20.7 76.18,19.73 EPD_C5.1 | 75.97,28.11 75.76,28.32 59,28.32 40.79,10.11 38.85,10.11 37.54,11.42 34.35,11.42 TP17.TP | L1.2 79.98,28.18 76.11,28.18 75.97,28.11 | J1.16 80.75,15.58 80.75,18.97 80.05,19.66 80.05,25.97 79.85,26.17 78.95,26.17 78.74,25.97 78.74,24.79 78.6,24.65 75.34,24.65 75.21,24.65
EPD_3V3_C
  Top 0.3: 74.45,20.22 74.45,26.24 75.14,26.93 75.14,27.56 Q2.1 | 74.45,20.22 75.62,19.04 76.8,19.04 77.98,20.22 77.98,23.4 79.36,24.79 79.36,25.34 R_CL1.2 | U2.18 20.15,67.17 20.15,55.12 32.96,42.31 32.96,10.25 35.53,7.68 TP13.TP 35.66,7.75 39.06,7.75 45.29,13.98 65.37,13.98 71.54,20.15 74.31,20.15 74.45,20.22
EPD_BUSY  (via drill 0.3)
  Top 0.15: v82.82,12.88 84.28,14.33 84.28,15.37 J1.9 | v141.96,60.8 141.96,61.98 142.17,62.18 TP9.TP | v10.18,66.06 10.04,66.2 10.04,67.17 U2.26
  Bottom 0.15: v82.82,12.88 84.56,12.88 85.04,12.39 85.04,12.32 | 85.04,12.32 86.84,10.52 127.28,10.52 127.77,10.04 129.08,10.04 141.96,22.92 v141.96,60.8 | v10.18,66.06 10.18,54.01 9.07,52.9 9.07,52.63 12.67,49.02 14.34,49.02 15.24,48.12 15.24,45.49 48.96,11.77 84.56,11.77 85.04,12.25 85.04,12.32
EPD_CS  (via drill 0.3)
  Top 0.15: v81.09,13.36 82.75,15.02 82.75,15.37 J1.12 | v48.68,32.27 49.45,32.27 49.52,32.34 R9.1 | v49.52,36.21 49.52,37.32 D6.1 | v29.36,40.23 20.15,49.44 20.15,49.65 U2.11 | v129.08,11.08 135.04,5.12 137.12,5.12 TP10.TP
  Bottom 0.15: v49.52,36.21 49.52,35.87 48.68,35.04 | 48.68,35.04 48.68,32.34 v48.68,32.27 48.68,32.2 68.56,12.32 72.85,12.32 73.89,13.36 v81.09,13.36 81.16,13.36 85.25,13.36 87.53,11.08 v129.08,11.08 | v29.36,40.23 43.42,40.23 48.62,35.04 48.68,35.04
EPD_DC  (via drill 0.3)
  Top 0.15: v82.2,12.88 83.24,13.92 83.24,15.37 J1.11 | v84.49,12.32 85.39,12.32 v85.53,12.46 | v127.91,10.52 133.31,5.12 TP11.TP | v15.72,45.63 12.54,48.82 12.54,49.65 U2.5
  Bottom 0.15: v84.49,12.32 82.75,12.32 v82.2,12.88 82.13,12.88 81.3,12.05 49.31,12.05 v15.72,45.63 | v85.53,12.46 85.73,12.46 87.39,10.8 127.63,10.8 v127.91,10.52
EPD_RST  (via drill 0.3)
  Top 0.15: v83.86,16.62 83.86,15.44 J1.10 | v123.06,11.56 129.5,5.12 TP12.TP | v16.27,63.98 16.27,67.17 U2.21
  Bottom 0.15: v83.86,16.62 83.86,17.31 86.29,19.73 86.29,30.19 83.1,33.38 83.1,33.65 | 83.1,33.65 83.45,34 100.62,34 v123.06,11.56 | v16.27,63.98 16.27,63.78 14.47,61.98 14.47,58.51 32.48,40.51 76.18,40.51 83.03,33.65 83.1,33.65
FLASH_CS  (via drill 0.3)
  Top 0.15: U1.1 31.65,61.56 29.78,59.69 29.78,52.28 30.47,51.59 30.47,51.45 R5.1 30.54,51.38 30.89,51.03 v31.3,51.03 | v32.13,51.73 32.48,51.38 32.96,51.38 D9.1 | v22.92,51.45 21.47,49.99 21.47,49.72 U2.12
  Bottom 0.15: v32.13,51.73 31.99,51.73 v31.3,51.03 31.23,51.03 30.82,51.45 v22.92,51.45
GDR  (via drill 0.3)
  Top 0.15: v83.73,18.9 85.32,18.9 87.74,16.48 87.74,15.44 J1.2 | v68.14,19.04 66.69,19.04 66.07,19.66 R4.1 | v63.5,18 62.88,18 Q3.1
  Bottom 0.15: v83.73,18.9 83.24,19.39 68.63,19.39 | 68.63,19.39 68.49,19.39 v68.14,19.04 | v63.5,18 65.86,18 68,20.15 68.28,20.15 68.63,19.8 68.63,19.46 68.63,19.39
GND  (via drill 0.3)
  Top 0.15: TP5.TP 83.79,93.97 78.81,93.97 TP4.TP 78.74,94.04 68.21,104.56 | IC1.3 49.45,95.63 49.58,95.63 51.52,97.57 51.52,97.85 51.66,97.99 52.77,97.99 54.57,96.19 54.57,95.91 C_DELAY.2 54.64,96.19 59.83,96.19 68.21,104.56 | 68.21,104.56 69.25,105.6 69.25,106.5 69.04,106.71 66.69,106.71 66.55,106.85 CHANGE_BUTTON.2 66.48,106.92 63.09,106.92 CHANGE_BUTTON.1 63.02,106.99 62.05,106.99 61.7,107.33 C10.2 59.63,107.33 C5.2 55.82,107.26 52.84,107.26 52.56,106.99 RESET_BUTTON.2 52.49,106.92 49.1,106.92 RESET_BUTTON.1 49.03,106.99 47.85,106.99 46.95,107.89 45.15,107.89 44.6,107.33 30.54,107.33 C6.2 28.46,107.33 28.12,106.99 27.22,106.99 BOOT_BUTTON.2 27.08,106.92 23.68,106.92 BOOT_BUTTON.1 23.61,106.85 20.98,106.85 20.78,106.64 4.57,106.64 2.29,104.36 2.29,96.12 J4.G4 2.22,96.05 1.25,95.08 1.25,93.21 | v36.57,39.75 36.77,39.54 36.77,38.91 D12.2 | D6.2 49.52,38.85 45.78,38.85 D10.2 45.71,38.85 41.97,38.85 D11.2 41.9,38.91 v41.07,39.75 41.07,39.81 41.07,44.73 33.03,52.76 D9.2 33.03,52.83 33.03,57.75 33.03,57.82 | 33.03,57.82 33.66,57.82 35.53,59.69 U1.9 | 33.03,57.82 31.72,57.82 U1.4 | D8.2 5.13,101.03 5.13,100.82 6.1,99.85 6.1,93.9 5.47,93.28 4.92,93.28 J4.P6 4.85,93.21 v3.74,93.21 | 1.25,93.21 1.25,82.96 J4.G3 | v1.32,93.21 1.25,93.21 | 13.37,93.76 13.37,99.02 C9.2 | 13.37,93.76 15.44,91.68 J4.G2 15.51,91.61 16.34,90.78 16.34,87.81 15.51,86.97 15.51,85.94 J4.G1 15.44,85.87 15.44,75.41 7.48,67.45 7.48,67.24 U2.28 7.48,67.17 7.48,62.67 11.91,58.24 U2.29_3 11.91,58.1 11.91,56.99 U2.29_2 11.91,56.85 11.91,55.67 U2.29_1 | U2.29_4 13.16,55.67 11.98,55.67 U2.29_1
  Top 0.15: U2.29_4 13.16,55.74 13.16,56.85 U2.29_5 13.16,56.99 13.16,58.1 U2.29_6 | U2.29_4 13.23,55.67 14.41,55.67 U2.29_7 14.41,55.74 14.41,56.85 U2.29_8 14.41,56.99 14.41,58.1 U2.29_9 | v9.56,52.76 7.48,50.69 7.48,49.72 U2.1 | v11.7,54.91 11.7,55.46 11.84,55.6 U2.29_1 | v12.74,93.21 13.3,93.76 13.37,93.76 | C2.2 158.79,5.74 159.97,5.74 C1.2 159.97,5.81 159.97,7.68 161.42,9.14 161.42,9.21 | 161.42,9.21 160.94,9.69 160.94,9.97 SENSOR2.7 160.87,10.04 160.87,10.25 160.11,11.01 160.11,12.88 SENSOR2.1 160.11,12.95 160.11,14.05 163.57,17.52 166.48,17.52 J3.1 166.55,17.59 166.82,17.59 167.38,18.14 167.38,49.44 167.38,49.51 | 161.42,9.21 161.98,9.21 162.46,9.69 162.46,9.97 SENSOR2.5 | U4.9 139.75,49.51 139.06,48.82 138.78,48.82 U4.4 138.71,48.75 138.71,44.66 137.67,43.62 136.63,43.62 | U4.9 139.82,49.51 140.03,49.3 140.65,49.3 U4.6 140.72,49.3 151.52,49.3 152.35,50.13 C4_USB.2 152.42,50.13 154.08,50.13 154.64,49.58 154.91,49.58 D1.2 | U4.9 139.75,49.58 139.06,50.27 138.78,50.27 U4.1 138.64,50.27 138.36,50.27 137.05,48.96 134.62,48.96 C2_BAT.2 | 136.63,43.62 134.55,45.7 132.13,45.7 MCP73831.2 | R2-USB1.1 155.61,45.77 156.85,47.02 R2-USB.2 156.85,47.09 v156.85,47.92 | D1.2 154.98,49.58 155.26,49.58 155.81,50.13 155.81,51.31 158.44,53.94 158.72,53.94 C5_USB.2 158.79,54.01 161.01,54.01 164.68,57.68 165.16,57.68 J2.B1 165.23,57.68 J2.A12 165.3,58.03 165.3,58.17 | v155.95,49.09 155.4,49.65 D1.2 | J2.B12 165.23,51.52 165.23,51.31 J2.A1 165.3,51.24 165.3,51.1 | 165.3,51.1 165.3,49.99 165.79,49.51 J2.MP3 165.85,49.51 167.38,49.51 | 167.38,49.51 J2.MP1 | 165.3,58.17 165.3,59.21 165.79,59.69 J2.MP4 165.85,59.76 169.73,59.76 J2.MP2
  Top 0.15: 165.3,51.1 165.37,51.1 166.55,51.1 166.96,51.52 166.96,57.75 166.55,58.17 165.37,58.17 165.3,58.17 | EPD_C2.2 73.61,27.35 71.12,27.35 EPD_C1.2 71.05,27.28 71.05,27.07 70.19,26.21 | 62.22,14.64 61.63,15.23 R2.1 | 62.22,14.64 62.33,14.54 63.78,14.54 63.85,14.61 64.75,14.61 C7.2 64.82,14.68 64.96,14.82 64.96,19.73 66,20.77 66,20.91 R4.2 66.07,20.98 66.07,22.09 70.19,26.21 | v60.53,12.88 60.66,12.74 61.43,12.74 SJ1.1 | v62.19,14.54 62.19,14.61 62.22,14.64 | 79.43,20.29 79.43,19.73 80.26,18.9 80.26,15.44 J1.17 | 79.43,20.29 78.81,20.91 EPD_C6.2 | v77.42,20.91 76.25,20.91 EPD_C5.2 | v79.43,20.36 79.43,20.29 | 82.62,20.98 83.79,20.98 EPD_C8.2 | 82.62,20.98 81.3,20.98 EPD_C7.2 81.23,20.98 v80.61,21.6 | J1.MP2 75.83,12.88 81.58,12.88 82.06,12.39 82.96,12.39 84.76,14.19 84.76,15.37 J1.8 84.76,15.44 84.76,16.34 82.62,18.49 82.62,20.91 82.62,20.98 | 87.05,20.29 87.05,19.32 89.26,17.1 89.26,12.95 J1.MP1 | 87.05,20.29 86.42,20.91 EPD_C9.2 86.29,20.98 85.66,21.6 v85.46,21.6 | 87.05,20.29 87.12,20.29 87.74,20.91 88.85,20.91 EPD_C10.2 88.92,20.98 91.41,20.98 EPD_C11.2 91.48,20.98 EPD_C12.2 93.97,21.05 93.97,28.46 93.21,29.22 93.21,31.71 D4.1 93.21,31.78 93.21,40.85 v98.75,46.39 | v70.29,26.17 70.22,26.17 70.19,26.21 | v95.15,50.13 94.04,50.13 C8.2 | C10_SUPERCAP.1 97.78,48.47 97.64,48.61 v96.67,48.61 96.61,48.61 96.26,48.26 94.04,48.26 92.94,47.16 87.81,47.16 87.05,47.92 87.05,48.68 U3.13 | 127.32,40.54 130.75,37.11 C3.- | 127.32,40.54 127.01,40.85 127.01,41.2 R2_BAT.1 | v123.47,32.68 122.57,31.78 C1_BAT2.2 | C1_BAT1.2 118.14,36.15 119.94,36.15 120.91,35.17 123.27,35.17 123.41,35.04 v123.47,35.04 123.68,35.04 124.17,35.52 124.31,35.52 IC4.2 124.17,35.59 123.61,36.15 123.61,36.84 127.28,40.51 127.32,40.54
  Top 0.15: v119.53,46.81 119.39,46.95 118.77,46.95 C1_BAT.2 | v132.27,34.97 134.55,34.97 R1_PWRUSB.1 | v136.63,43.42 136.63,43.55 136.63,43.62
  Bottom 0.15: v1.32,93.21 v3.74,93.21 3.81,93.21 v12.74,93.21 | v9.56,52.76 v11.7,54.91 11.77,54.91 26.94,39.75 36.5,39.75 v36.57,39.75 v41.07,39.75 41.07,39.68 41.07,38.78 62.19,17.66 62.19,14.61 v62.19,14.54 v60.53,12.88 | v156.85,47.92 156.85,48.19 v155.95,49.09 | v85.46,21.6 80.68,21.6 v80.61,21.6 79.43,20.43 v79.43,20.36 78.88,20.91 v77.42,20.91 77.35,20.91 75.55,20.91 v70.29,26.17 | v95.15,50.13 v96.67,48.61 96.74,48.61 98.75,48.61 | v123.47,35.04 v123.47,32.68 | v123.47,35.04 123.47,35.11 119.53,39.05 v119.53,46.81 119.46,46.81 117.66,48.61 98.75,48.61 | v123.47,35.04 123.54,34.97 v132.27,34.97 132.27,35.04 136.63,39.4 v136.63,43.42 | v98.75,46.39 98.75,48.54 98.75,48.61
  pour Top: 0,49.53 0,0 73.66,0 73.66,10.16 91.44,10.16 91.44,0 171.45,0 171.45,67.31 93.98,67.31 93.98,111.76 67.31,111.76 67.31,109.22 20.32,109.22 20.32,111.76 0,111.76 0,67.31 6.35,67.31 6.35,49.53
  pour Bottom: 0,49.53 0,0 73.66,0 73.66,10.16 91.44,10.16 91.44,0 171.45,0 171.45,67.31 93.98,67.31 93.98,111.76 67.31,111.76 67.31,109.22 20.32,109.22 20.32,111.76 0,111.76 0,67.31 6.35,67.31 6.35,49.53
GPIO8
  Top 0.15: R1.2 19.04,46.39 19.04,49.51 18.91,49.65 U2.10
I2C_PW  (via drill 0.3)
  Top 0.15: SENSOR2.2 160.94,12.88 160.94,10.94 161.63,10.25 161.63,10.04 SENSOR2.6 161.7,10.25 162.19,10.73 162.81,10.73 163.02,10.52 163.02,6.3 162.53,5.81 R1_PINH.2 162.53,5.74 161.35,5.74 R2-PINH.2 161.28,5.68 160.04,4.43 C1.1 159.97,4.43 158.79,4.43 C2.1 158.72,4.5 158.03,5.19 158.03,6.16 | 158.03,6.16 160.04,8.17 160.04,9.97 SENSOR2.8 | v38.78,62.25 38.44,62.6 25.76,62.6 21.47,66.89 21.47,67.17 U2.17 | v131.44,13.02 151.1,13.02 157.96,6.16 158.03,6.16
  Bottom 0.15: v38.78,62.25 82.2,62.25 v131.44,13.02
INT_RTC  (via drill 0.3)
  Top 0.15: 87.19,64.26 87.19,59.41 88.23,58.37 88.23,58.03 U3.3 | 87.19,64.26 87.19,66.54 87.39,66.75 90.37,66.75 99.24,57.89 99.24,47.5 97.5,45.77 93.42,45.77 R1_PINH1.1 | v16.34,45.63 16.34,49.65 U2.8 | v18.56,43.42 18.56,19.59 30.47,7.68 TP15.TP | v38.64,35.17 50.07,35.17 79.15,64.26 87.12,64.26 87.19,64.26
  Bottom 0.15: v16.34,45.63 v18.56,43.42 18.63,43.42 26.87,35.17 v38.64,35.17
IO/BOOT  (via drill 0.3)
  Top 0.15: R_BOOT.2 20.36,107.33 22.51,107.33 23.61,108.44 BOOT_BUTTON.4 23.68,108.44 27.08,108.44 BOOT_BUTTON.3 27.22,108.37 27.91,107.68 v28.19,107.68 | v29.02,106.85 29.78,106.09 30.47,106.09 C6.1 | v23.96,101.72 23.96,67.24 U2.15
  Bottom 0.15: v28.19,107.68 v29.02,106.85 29.02,106.78 v23.96,101.72
IO/CHANGE  (via drill 0.3)
  Top 0.15: R_CHANGE.2 68.56,107.33 67.66,107.33 66.55,108.44 CHANGE_BUTTON.3 66.48,108.44 63.09,108.44 CHANGE_BUTTON.4 63.02,108.37 62.33,107.68 v61.98,107.68 | v61.15,106.85 60.39,106.09 59.7,106.09 C10.1 | v22.99,77.56 13.85,68.41 13.85,67.24 U2.23
  Bottom 0.15: v61.98,107.68 v61.15,106.85 61.08,106.85 58.59,104.36 47.58,104.36 22.99,79.77 v22.99,77.56
MISO  (via drill 0.3)
  Top 0.15: R8.1 38.09,32.41 38.09,32.54 36.84,33.79 36.84,37.32 D12.1 36.77,37.39 36.08,38.08 36.08,39.75 29.5,46.33 29.5,60.38 | 32.34,61.91 32.34,61.28 31.72,60.66 31.72,60.38 U1.2 | 32.34,61.91 32.2,62.04 31.16,62.04 29.5,60.38 | v15.24,60.38 8.73,66.89 8.73,67.17 U2.27 8.73,67.24 8.94,67.45 v8.94,68.28 | v29.43,60.38 29.5,60.38 | v3.26,90.92 3.26,93.34 4.22,94.31 5.06,94.31 J4.P7 | v39.96,63.71 55.26,63.71 85.53,93.97 88.85,93.97 TP6.TP | v32.48,61.98 32.41,61.91 32.34,61.91
  Bottom 0.15: v29.43,60.38 v15.24,60.38 | v3.26,90.92 3.26,73.96 v8.94,68.28 | v39.96,63.71 34.21,63.71 v32.48,61.98
MOSI  (via drill 0.3)
  Top 0.15: v82.13,19.87 82.13,19.39 81.86,19.11 81.86,15.44 J1.14 | v57.06,31.78 42.52,31.78 41.97,32.34 R7.1 41.97,32.41 v42.66,33.1 | 42.66,36.63 46.26,36.63 47.71,38.08 50.07,38.08 50.21,38.22 50.21,47.99 40.44,57.75 39.47,57.75 U1.5 39.4,57.75 39.2,57.54 v38.57,57.54 | 42.66,36.63 41.97,37.32 D11.1 | v19.81,54.63 15.1,49.92 15.1,49.72 U2.7 15.03,49.65 15.03,49.37 v14.2,48.54 | v7.2,68.28 7.2,88.5 5.82,89.88 5.13,89.88 J4.P3 | v99.17,62.25 132.06,62.25 TP7.TP | v42.66,36.56 42.66,36.63
  Bottom 0.15: v82.13,19.87 68.97,19.87 v57.06,31.78 | v19.81,54.63 35.66,54.63 v38.57,57.54 38.57,57.61 38.3,57.89 38.3,62.39 38.64,62.74 38.92,62.74 39.13,62.53 82.34,62.53 82.62,62.25 v99.17,62.25 | v7.2,68.28 7.2,54.08 12.74,48.54 v14.2,48.54 | v42.66,36.56 v42.66,33.1
N$1
  Top 0.15: R2-USB1.2 156.92,45.77 157.13,45.77 164.68,53.32 165.23,53.32 J2.A5
N$2  (via drill 0.3)
  Top 0.15: v156.23,47.71 156.23,47.64 155.61,47.02 R2-USB.1 | v164.26,55.95 164.61,56.3 165.23,56.3 J2.B5
  Bottom 0.15: v156.23,47.71 156.44,47.71 156.71,47.43 156.99,47.43 163.78,54.22 163.78,55.46 v164.26,55.95
N$3
  Top 0.15: C1_BAT1.1 118.14,34.9 118.49,34.55 120.64,34.55 D2.1 120.7,34.55 124.31,34.55 IC4.3 124.37,34.62 124.79,35.04 124.86,35.04 125,35.17 125,35.94 | 125,35.94 124.37,36.56 IC4.1 | Q1.2 138.09,42.17 138.09,38.57 135.11,35.59 129.71,35.59 128.25,37.05 126.17,37.05 125.07,35.94 125,35.94
N$4  (via drill 0.3)
  Top 0.15: v68.42,17.79 67.24,17.79 C4.1 | v90.44,31.02 89.75,31.71 D4.2 | v88.02,33.38 85.73,35.66 81.78,35.66 D3.1
  Bottom 0.15: v68.42,17.79 71.74,17.79 75.48,14.05 84.97,14.05 90.44,19.52 v90.44,31.02 90.37,31.02 v88.02,33.38
N$5  (via drill 0.3)
  Top 0.15: v121.95,43.76 121.33,44.39 R1_BAT.1 | v132.13,44.11 132.13,44.73 MCP73831.1
  Bottom 0.15: v121.95,43.76 131.78,43.76 v132.13,44.11
N$6  (via drill 0.3)
  Top 0.15: v120.36,46.81 120.5,46.95 121.12,46.95 CHG_LED.C | v121.95,45.22 121.95,45.01 122.5,44.45 R1_BAT.2
  Bottom 0.15: v121.95,45.22 v120.36,46.81
N$7
  Top 0.15: R2_BAT.2 127.01,42.59 127.35,42.59 129.5,44.73 MCP73831.5
N$8  (via drill 0.3)
  Top 0.15: v76.25,15.16 76.45,15.37 76.8,15.37 J1.24 | v88.02,18.97 93.28,18.97 EPD_C12.1
  Bottom 0.15: v76.25,15.16 84.83,15.16 88.02,18.35 v88.02,18.97
N$9
  Top 0.15: IC1.5 52.22,97.43 52.22,97.01 54.57,94.66 C_DELAY.1
N$10  (via drill 0.3)
  Top 0.15: v75.55,15.72 76.18,16.34 77.28,16.34 77.77,15.86 77.77,15.44 J1.22 | v88.09,19.59 88.78,19.59 88.85,19.66 EPD_C10.1
  Bottom 0.15: v75.55,15.72 75.55,15.23 76.11,14.68 84.76,14.68 88.5,18.42 88.5,19.18 v88.09,19.59
N$11
  Top 0.15: D7.1 87.88,65.99 87.88,65.23 89.54,63.57 R_CAPACITOR.2
N$12  (via drill 0.3)
  Top 0.15: v79.29,17.1 78.81,16.62 78.81,15.44 J1.20 | v83.1,18.9 83.86,19.66 EPD_C8.1
  Bottom 0.15: v79.29,17.1 81.16,18.97 83.03,18.97 v83.1,18.9
N$13  (via drill 0.3)
  Top 0.15: v79.29,16.48 79.29,15.44 J1.19 | v81.3,18.49 81.3,19.66 EPD_C7.1
  Bottom 0.15: v81.3,18.49 v79.29,16.48
N$14
  Top 0.15: J1.18 79.78,15.44 79.78,18.69 78.81,19.66 EPD_C6.1
N$15  (via drill 0.3)
  Top 0.15: v85.25,16.2 85.87,16.2 86.29,15.79 86.29,15.44 J1.5 | v69.53,18.9 69.53,21.88 73.61,25.97 EPD_C2.1
  Bottom 0.15: v85.25,16.2 84.49,16.2 84,15.72 76.18,15.72 72.99,18.9 v69.53,18.9
N$16  (via drill 0.3)
  Top 0.15: v86.29,17.31 86.77,16.82 86.77,15.44 J1.4 | v87.05,21.6 86.08,21.6 85.59,22.09 v85.11,22.09 | v71.74,25.34 71.12,25.97 EPD_C1.1
  Bottom 0.15: v86.29,17.31 86.29,18 87.05,18.76 v87.05,21.6 | v85.11,22.09 75,22.09 v71.74,25.34
PREVGH  (via drill 0.3)
  Top 0.15: v78.32,16.2 78.32,15.44 J1.21 | v85.53,20.01 86.08,20.01 86.36,19.73 EPD_C9.1 | v89.68,24.86 89.68,27.9 D5.1
  Bottom 0.15: v78.32,16.2 78.95,16.2 79.15,15.99 81.51,15.99 82.65,17.14 | v85.53,20.01 82.65,17.14 | v89.68,24.86 86.56,21.74 86.56,18.69 84,16.13 83.66,16.13 82.69,17.1 82.65,17.14
PREVGL  (via drill 0.3)
  Top 0.15: v75.62,14.54 75.62,15.16 76.52,16.06 77.01,16.06 77.28,15.79 77.28,15.44 J1.23 | v89.96,19.66 91.41,19.66 EPD_C11.1 | v83.59,33.51 82.62,33.51 80.47,35.66 78.32,35.66 D3.2
  Bottom 0.15: v75.62,14.54 75.83,14.54 75.97,14.4 84.9,14.4 89.96,19.46 v89.96,19.66 89.96,19.73 90.17,19.94 90.17,26.73 83.59,33.31 v83.59,33.51
RESE  (via drill 0.3)
  Top 0.15: v72.71,12.81 73.41,12.12 83.1,12.12 83.79,12.81 85.04,12.81 87.26,15.02 87.26,15.37 J1.3 | v68.14,19.66 R3.1 | v64.47,17.1 64.2,17.38 64.2,17.93 Q3.2
  Bottom 0.15: 67.66,17.86 v72.71,12.81 | 67.66,17.86 67.66,19.18 v68.14,19.66 | v64.47,17.1 66.83,17.1 67.59,17.86 67.66,17.86
RESE'  (via drill 0.3)
  Top 0.15: R3.2 68,20.98 72.23,25.2 72.23,25.69 73.13,26.59 74.03,26.59 74.38,26.93 74.38,27.7 74.17,27.9 70.22,27.9 62.4,20.08 62.4,17.38 62.81,16.96 62.81,15.3 R2.2 62.95,15.23 63.16,15.02 v63.64,15.02 | v63.99,12.74 63.02,12.74 SJ1.2
  Bottom 0.15: v63.99,12.74 63.99,14.68 v63.64,15.02
RESET  (via drill 0.3)
  Top 0.15: RESET_BUTTON.3 52.49,108.44 49.1,108.44 RESET_BUTTON.4 49.03,108.37 48.89,108.37 v47.99,107.47 | v48.2,104.84 49.38,103.66 49.38,97.5 IC1.1 | R_RESET.2 45.78,107.26 v46.54,106.5 46.61,106.5 47.02,106.09 55.82,106.09 C5.1 | v10.67,58.44 10.04,57.82 10.04,49.72 U2.3
  Bottom 0.15: v46.54,106.5 46.78,106.26 | 46.78,106.26 47.89,105.15 | 47.89,105.15 v48.2,104.84 | v10.67,58.44 10.67,59.9 22.51,71.74 22.51,79.77 47.85,105.12 47.89,105.15 | v47.99,107.47 46.81,106.29 46.78,106.26
RTC_RST  (via drill 0.3)
  Top 0.15: v38.85,66.06 23.55,66.06 22.71,66.89 22.71,67.17 U2.16 | v81.51,63.78 86.98,58.3 86.98,58.03 U3.4
  Bottom 0.15: v38.85,66.06 79.22,66.06 v81.51,63.78
RX  (via drill 0.3)
  Top 0.15: v23.48,78.66 12.54,67.72 12.54,67.24 U2.24 | v82.82,98.05 83.79,99.02 TP2.TP
  Bottom 0.15: v23.48,78.66 63.43,78.66 v82.82,98.05
SCK  (via drill 0.3)
  Top 0.15: v83.31,17.17 82.34,16.2 82.34,15.44 J1.13 | v50.41,32.96 45.01,32.96 44.46,32.41 R6.1 | 49.76,35.83 49.65,35.73 42.24,35.73 41.21,36.77 41.21,37.95 41.34,38.08 45.01,38.08 45.71,37.39 D10.1 | 49.76,35.83 50.48,36.56 50.48,48.12 39.61,59 39.47,59 U1.6 39.4,59 v37.95,57.54 | U2.6 13.85,49.72 13.85,49.99 v19.6,55.74 19.6,55.81 19.6,56.64 13.99,62.25 v13.99,63.85 | v6.23,92.51 5.89,92.17 5.13,92.17 J4.P5 | v133.45,62.25 137.12,62.25 TP8.TP | v49.93,35.66 49.79,35.8 49.76,35.83
  Bottom 0.15: v83.31,17.17 86.01,19.87 86.01,21.81 74.86,32.96 v50.41,32.96 50.41,33.03 50.41,35.17 v49.93,35.66 | v19.6,55.74 36.15,55.74 v37.95,57.54 37.95,57.61 37.95,62.46 38.5,63.01 39.06,63.01 39.27,62.81 99.24,62.81 99.79,62.25 v133.45,62.25 | v6.23,92.51 6.23,71.6 v13.99,63.85
SCL  (via drill 0.3)
  Top 0.15: R2-PINH.1 161.35,4.43 161.91,3.87 163.15,3.87 163.57,4.29 163.57,11.84 162.53,12.88 SENSOR2.4 162.53,12.95 v162.53,15.86 | v142.45,49.79 v141.48,49.79 140.72,49.79 U4.7 | v166.48,25.76 166.48,20.56 J3.4 | v19.6,64.95 17.66,66.89 17.66,67.17 U2.20 | v40.51,57.06 v36.77,57.06 | v91.48,48.96 91.06,48.96 90.86,48.75 U3.16 | v96.12,49.79 95.43,49.79 95.22,49.58 v92.38,49.58
  Bottom 0.15: v142.45,49.79 v166.48,25.76 166.48,25.69 162.53,21.74 v162.53,15.86 | v19.6,64.95 28.88,64.95 v36.77,57.06 | v40.51,57.06 83.38,57.06 v91.48,48.96 91.55,48.96 92.17,49.58 v92.38,49.58 | v96.12,49.79 v141.48,49.79
SDA  (via drill 0.3)
  Top 0.15: R1_PINH.1 162.6,4.5 162.6,4.64 163.29,5.33 163.29,11.08 161.7,12.67 161.7,12.88 SENSOR2.3 161.7,12.95 v161.7,14.4 | v143.07,49.79 142.59,50.27 140.72,50.27 U4.8 | v165.58,27.28 165.58,20.15 166.13,19.59 166.48,19.59 J3.3 | v19.6,66.06 18.91,66.75 18.91,67.17 U2.19 | v78.81,63.29 78.81,58.44 87.74,49.51 87.74,47.64 87.95,47.43 88.64,47.43 89.47,48.26 89.47,48.68 U3.15
  Bottom 0.15: v161.7,14.4 166.96,19.66 166.96,25.97 165.65,27.28 v165.58,27.28 v143.07,49.79 143.07,49.86 143.07,60.31 140.09,63.29 78.88,63.29 v78.81,63.29 41,63.29 38.23,66.06 v19.6,66.06
SRC  (via drill 0.3)
  Top 0.15: v65.44,18.62 65.86,18.21 65.86,17.79 C4.2 | v64.13,19.94 63.64,19.94 63.5,20.08 Q3.3 | v87.53,31.37 90.93,27.97 93.14,27.97 D5.2 | v86.15,32.75 80.05,32.75 L1.1 79.98,32.82 78.39,34.41 v49.93,34.41
  Bottom 0.15: v65.44,18.62 v64.13,19.94 64.06,19.94 62.81,19.94 49.93,32.82 v49.93,34.41 | v86.15,32.75 v87.53,31.37
SS_SD
  Top 0.15: R10.1 5.06,104.7 5.06,102.35 4.36,101.66 4.36,100.34 5.06,99.65 D8.1 5.06,99.51 5.06,96.95 2.77,94.66 2.77,90.78 4.71,88.84 5.47,88.84 J4.P2 5.54,88.78 6.72,87.6 6.72,63.01 11.22,58.51 11.22,49.72 U2.4
TX  (via drill 0.3)
  Top 0.15: v23.48,79.63 11.29,67.45 11.29,67.24 U2.25 | v77.77,98.05 78.74,99.02 TP1.TP
  Bottom 0.15: v23.48,79.63 59.35,79.63 v77.77,98.05
USB_D+  (via drill 0.3)
  Top 0.15: v110.66,50.76 152.97,50.76 153.18,50.55 154.91,50.55 D1.1 | v94.73,50.76 93.42,50.76 v92.87,50.2 | v25.14,48.47 23.96,49.65 U2.14
  Bottom 0.15: v94.73,50.76 v110.66,50.76 | v92.87,50.2 92.87,49.44 91.9,48.47 v25.14,48.47
USB_D-  (via drill 0.3)
  Top 0.15: v153.6,49.65 154.64,48.61 154.91,48.61 D1.3 | v22.92,50.83 22.92,49.92 22.71,49.72 U2.13
  Bottom 0.15: v153.6,49.65 153.6,50.2 137.25,66.54 19.46,66.54 14.75,61.84 14.75,59 v22.92,50.83
VBAT
  Top 0.3: U4.2 138.71,49.72 138.71,49.3 U4.3 138.57,49.23 138.16,49.23 135.66,46.74 135.56,46.64 | 135.56,46.64 134.62,47.57 C2_BAT.1 134.49,47.5 133.65,46.67 132.13,46.67 MCP73831.3 131.99,46.74 130.95,47.78 112.88,47.78 93.49,67.17 93.49,91.2 88.92,95.77 88.92,99.02 TP3.TP | 135.56,46.64 137.12,45.08 137.12,44.32 Q1.3
VBUS
  Top 0.3: 154.22,47.99 153.39,48.82 152.42,48.82 C4_USB.1 | 154.22,47.99 155.68,47.99 156.58,48.89 156.58,49.02 157.06,49.51 157.41,49.51 D1.5 157.61,49.51 157.82,49.51 158.72,50.41 158.72,52.63 C5_USB.1 | 154.15,42.93 154.15,47.85 154.22,47.99 | 154.15,42.93 154.15,40.02 154.36,39.81 156.09,39.81 158.17,41.89 159.69,41.89 PFMF.050.1.2 | 134.73,40.75 136.15,42.17 Q1.1 136.28,42.31 136.91,42.93 154.01,42.93 154.15,42.93 | 134.73,40.75 134.62,40.65 R1_PWRUSB.2 | 120.64,46.26 118.21,46.26 117.52,46.95 C1_BAT.1 | 120.64,46.26 121.67,46.26 122.37,46.95 122.64,46.95 CHG_LED.A 122.78,46.88 122.99,46.67 129.5,46.67 MCP73831.4 129.57,46.53 130.4,45.7 130.4,45.08 134.62,40.85 134.73,40.75 | 120.64,46.26 120.64,46.12 120.64,36.63 D2.2 120.5,36.84 117.52,36.84 91.76,11.08 73.34,11.08 69.94,7.68 41.97,7.68 TP14.TP
VRTC
  Top 0.3: C10_SUPERCAP.2 97.78,50.62 96.05,48.89 94.04,48.89 C8.1 93.84,48.89 92.31,48.89 91.2,49.99 88.99,49.99 88.85,49.99 | 88.85,49.99 88.85,49.3 88.3,48.75 U3.14 | 88.85,49.99 88.85,59.14 88.3,59.69 88.3,63.5 R_CAPACITOR.1
VUSB
  Top 0.3: J2.A9 165.23,57.13 165.23,56.92 J2.B4 165.37,56.85 165.92,56.85 166.13,56.64 166.13,52.63 165.92,52.42 165.37,52.42 J2.B9 165.23,52.07 J2.A4 165.09,52 164.54,52 155.26,42.72 155.26,41.96 PFMF.050.1.1